# Altium PCB ECG_NEMO_final_V1B_main_stack1_fix.PcbDoc
Units mm, origin at the board's own origin, x right, y up, seen from the top; angles counter-clockwise.
Board outline 53.37 x 46.3 mm, 4 copper layers (Top Layer, Signal Layer 1, Signal Layer 2, Bottom Layer), stack 0.778 mm thick; 52 components, 36 nets, 182 pads, 117 vias.
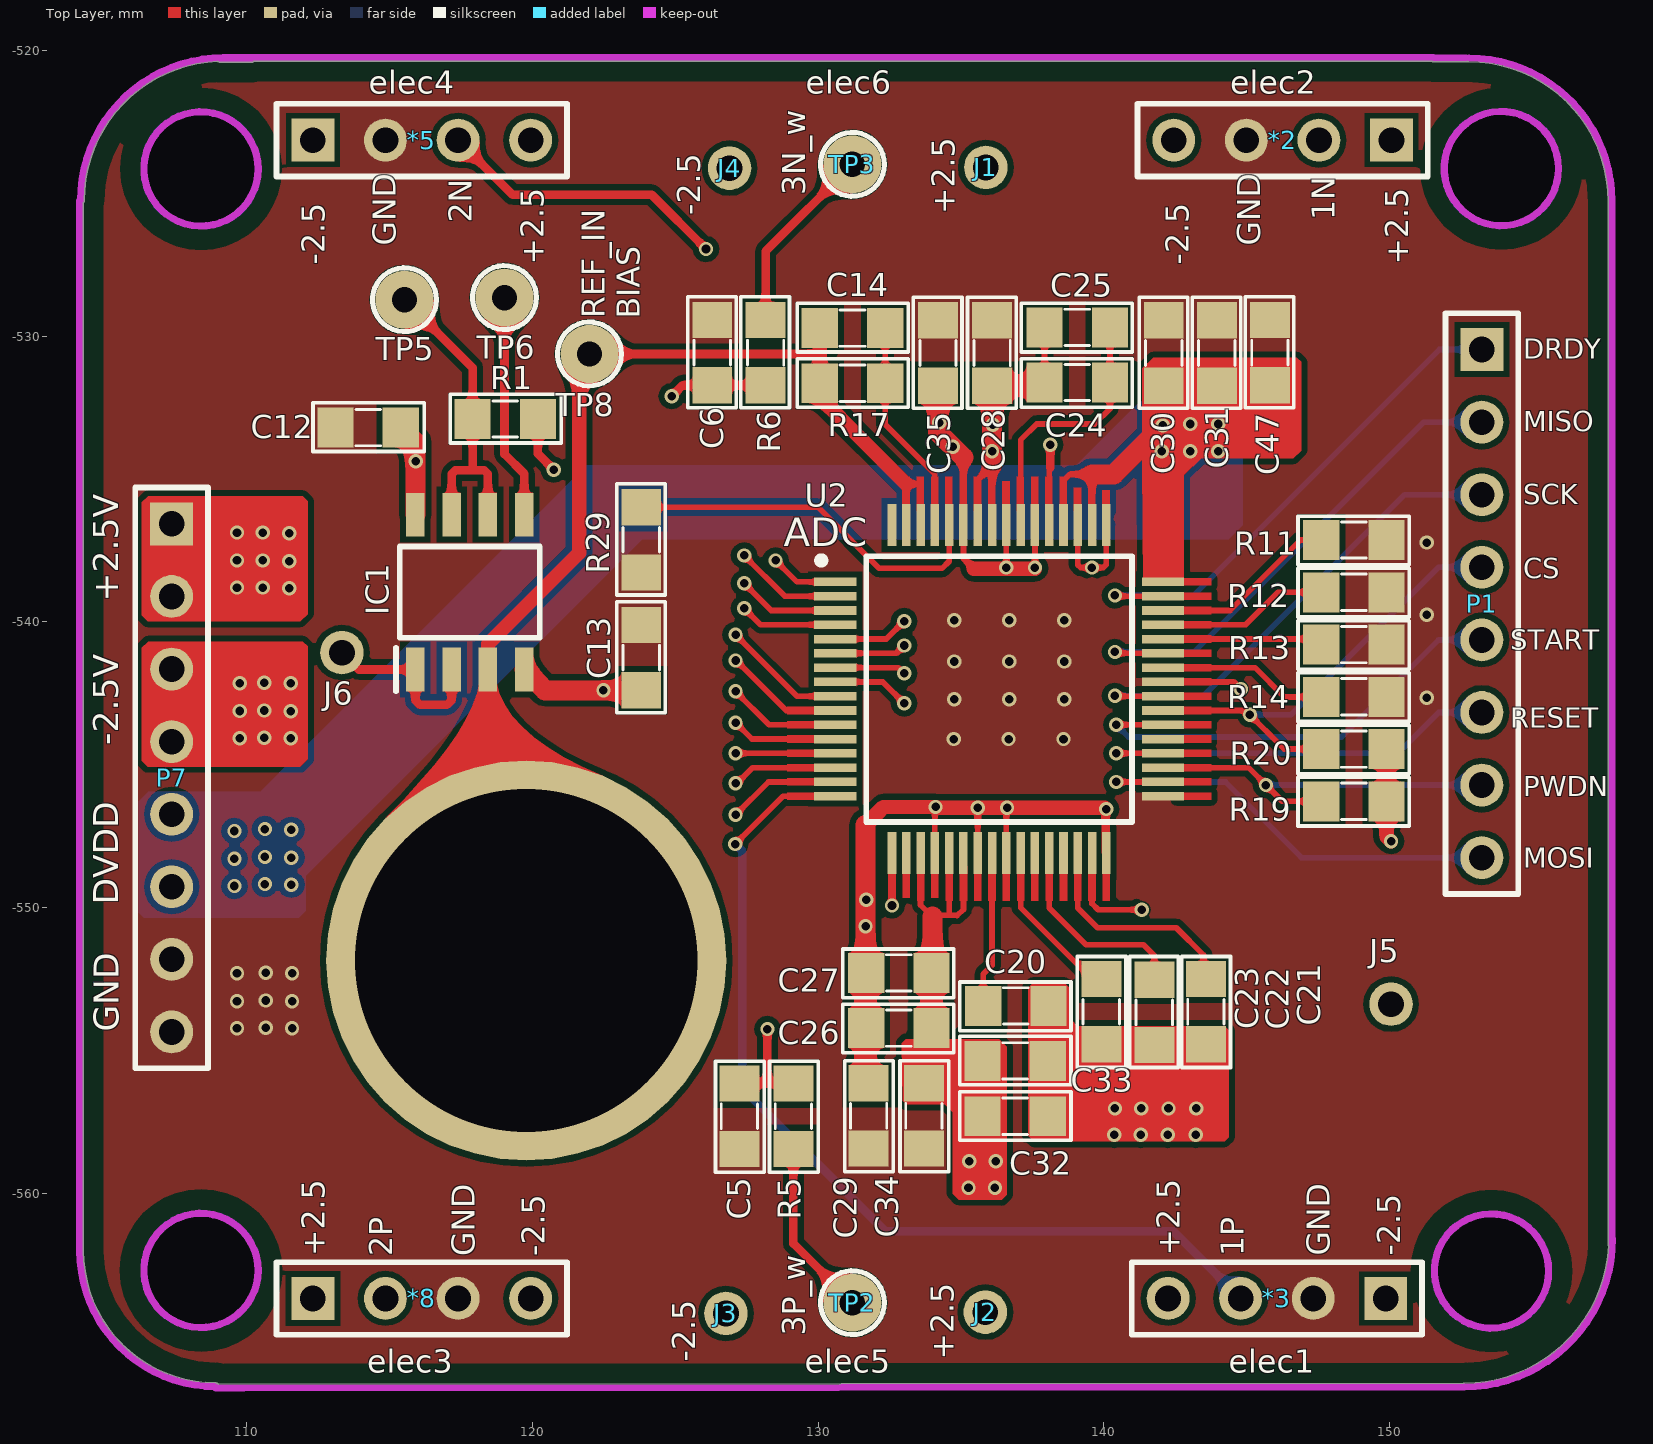
[diagram p0: Top Layer view]
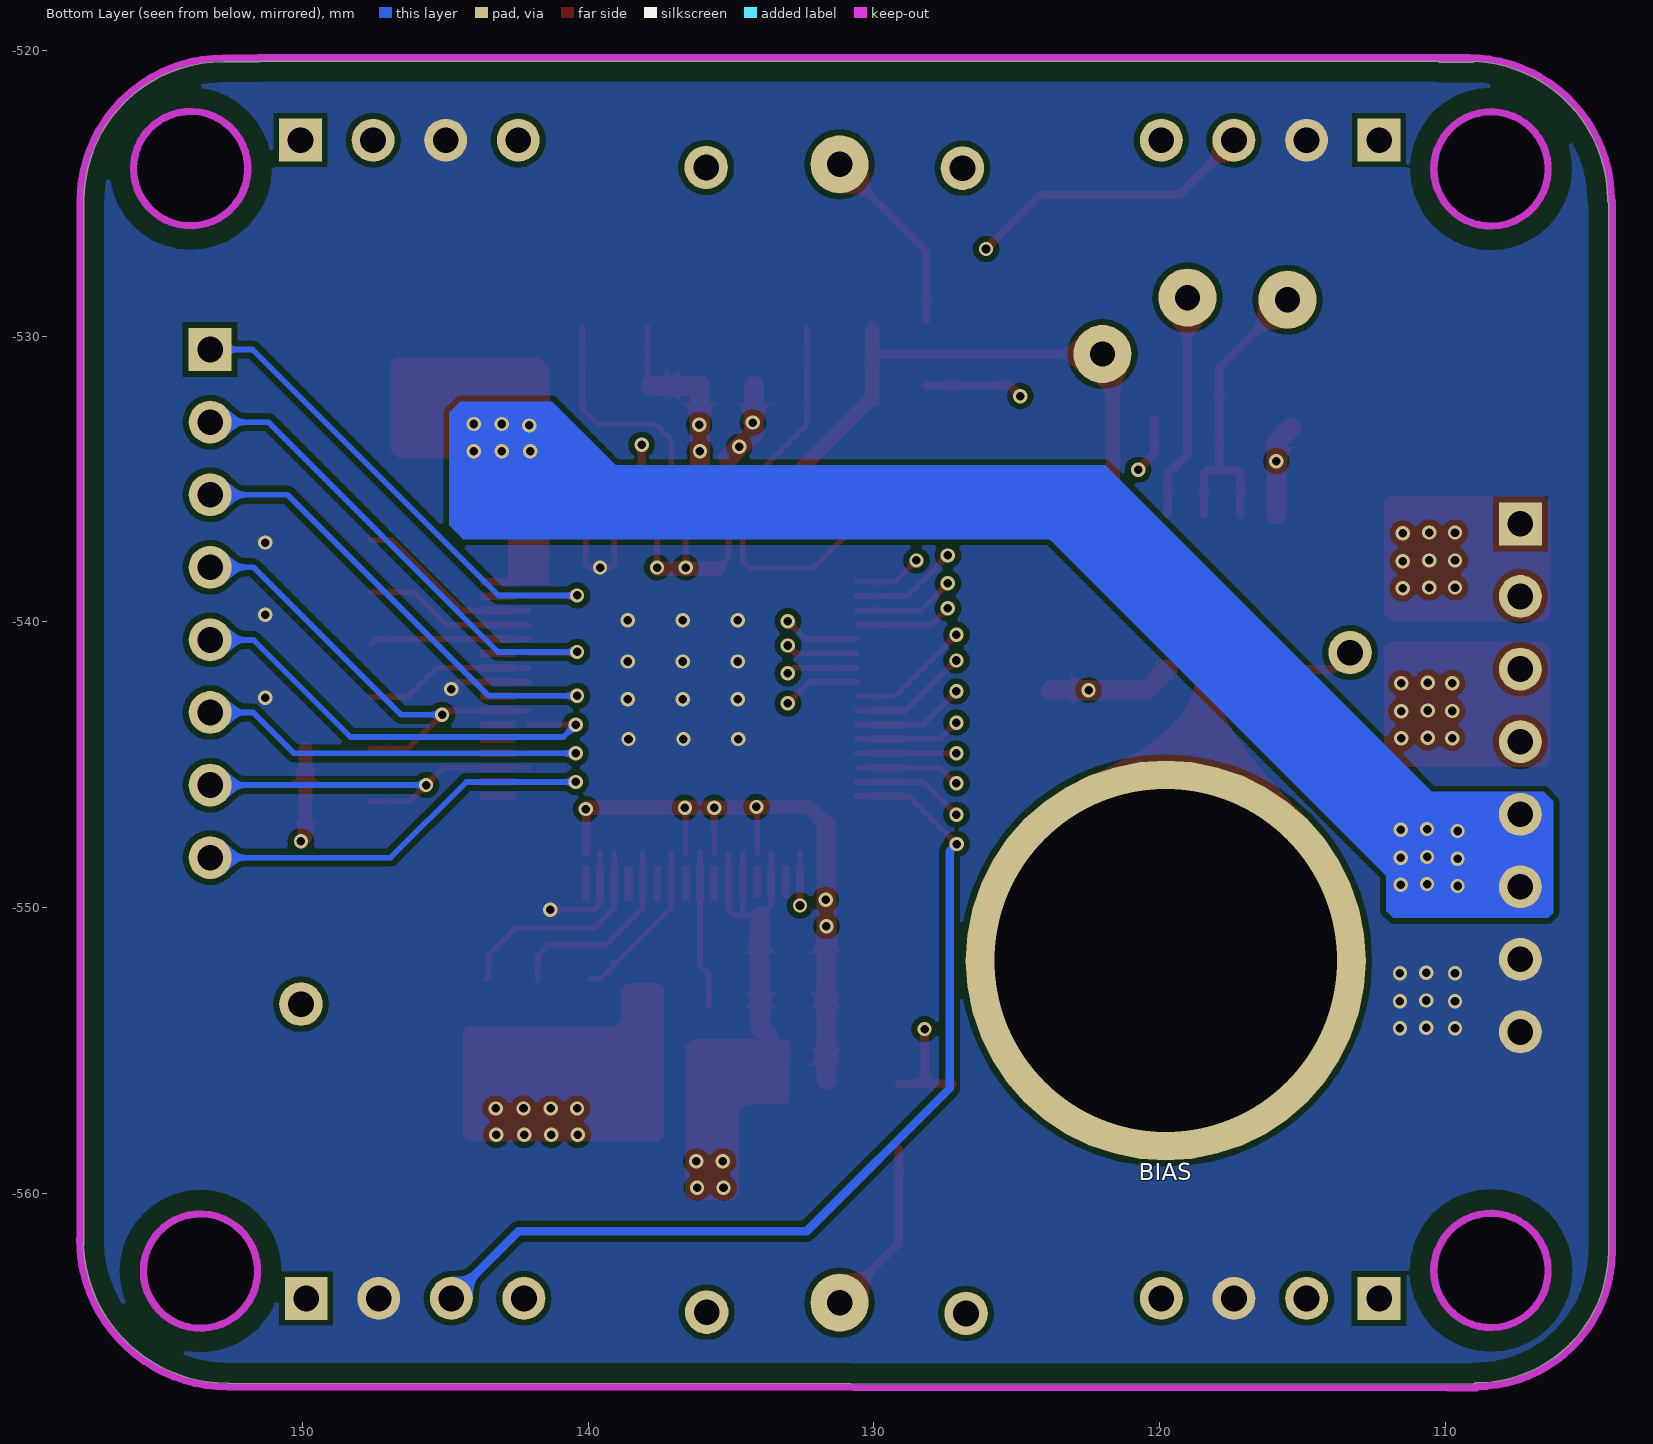
[diagram p1: Bottom Layer view, seen from below]
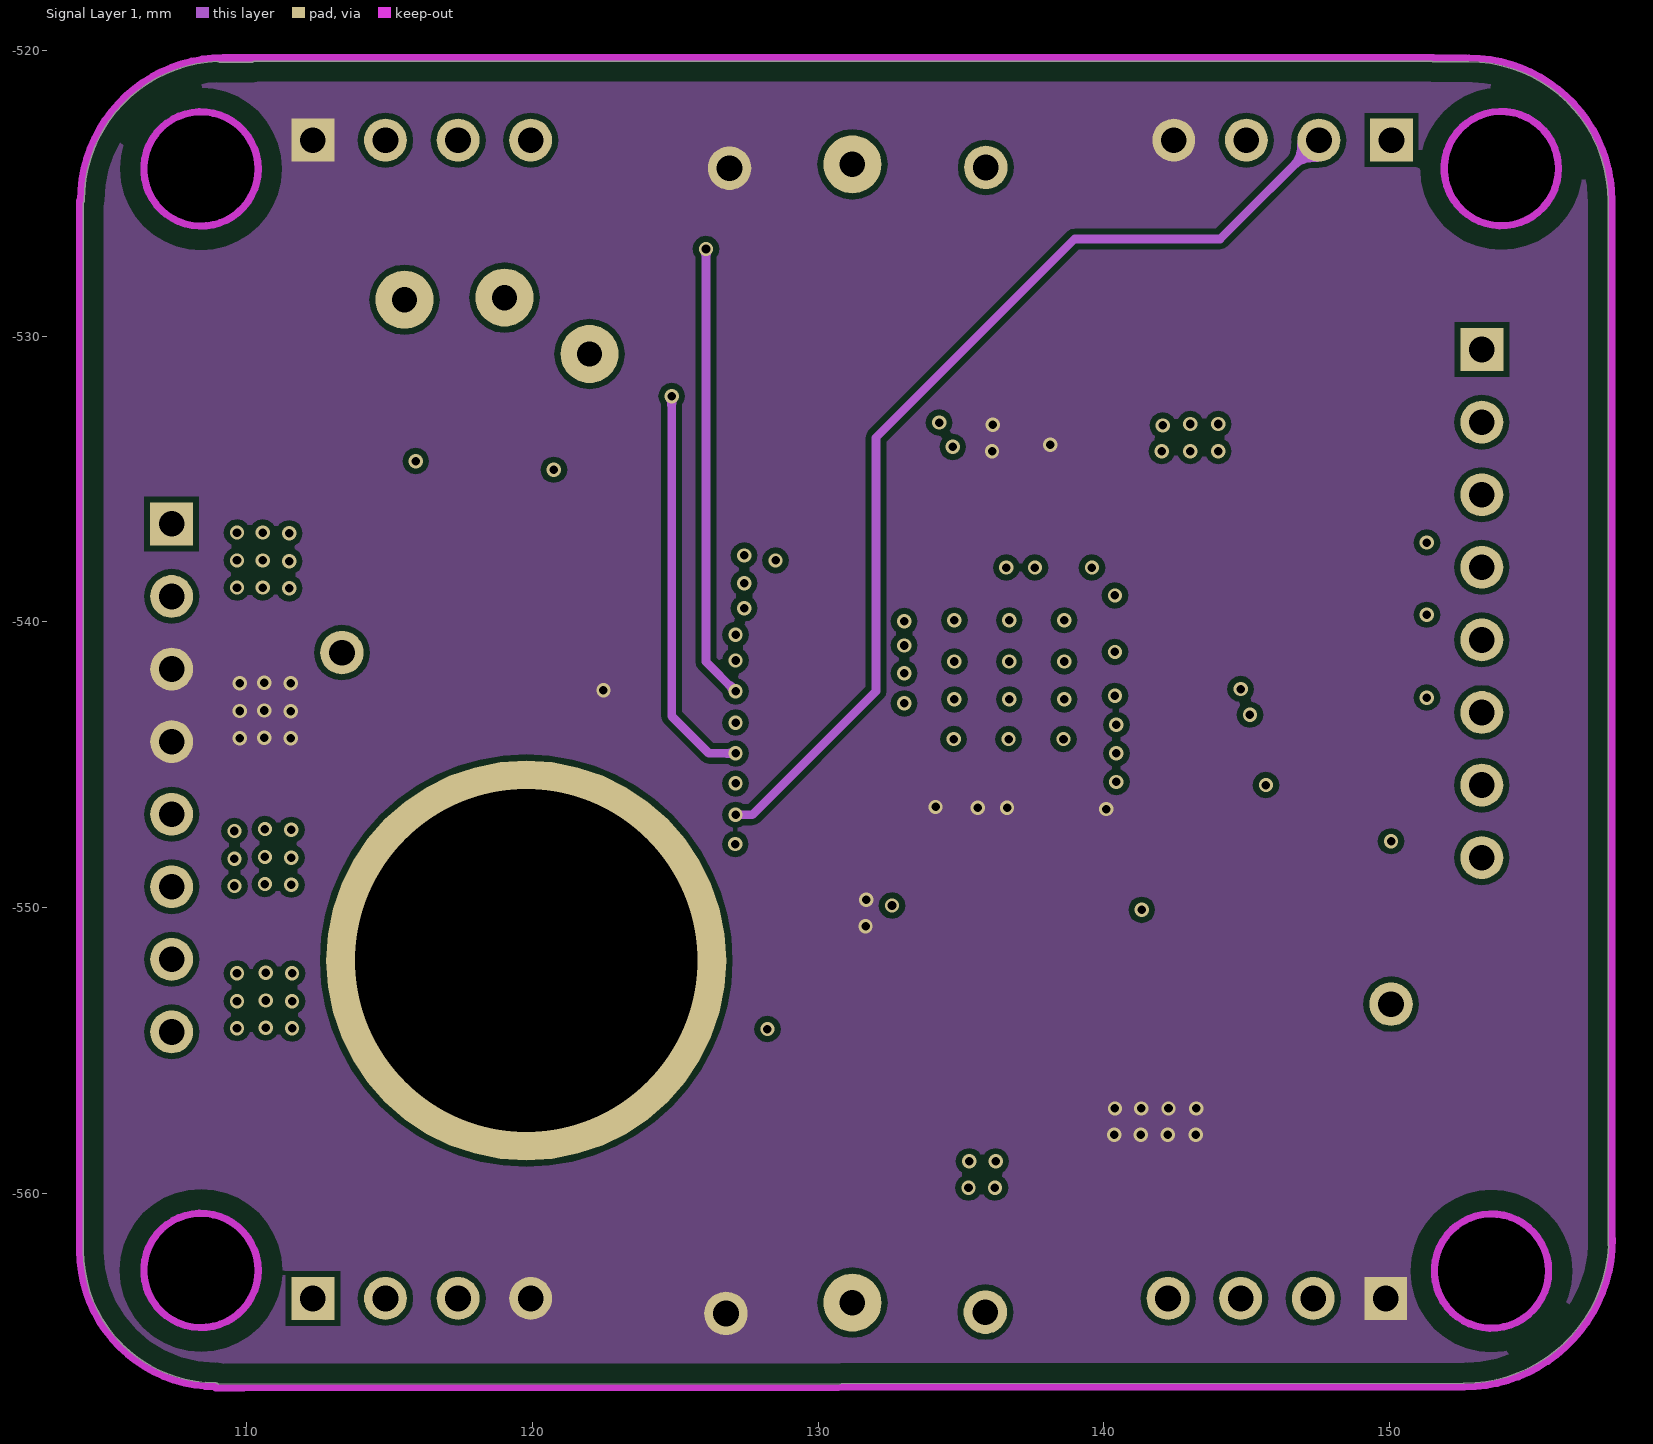
[diagram p2: Signal Layer 1]
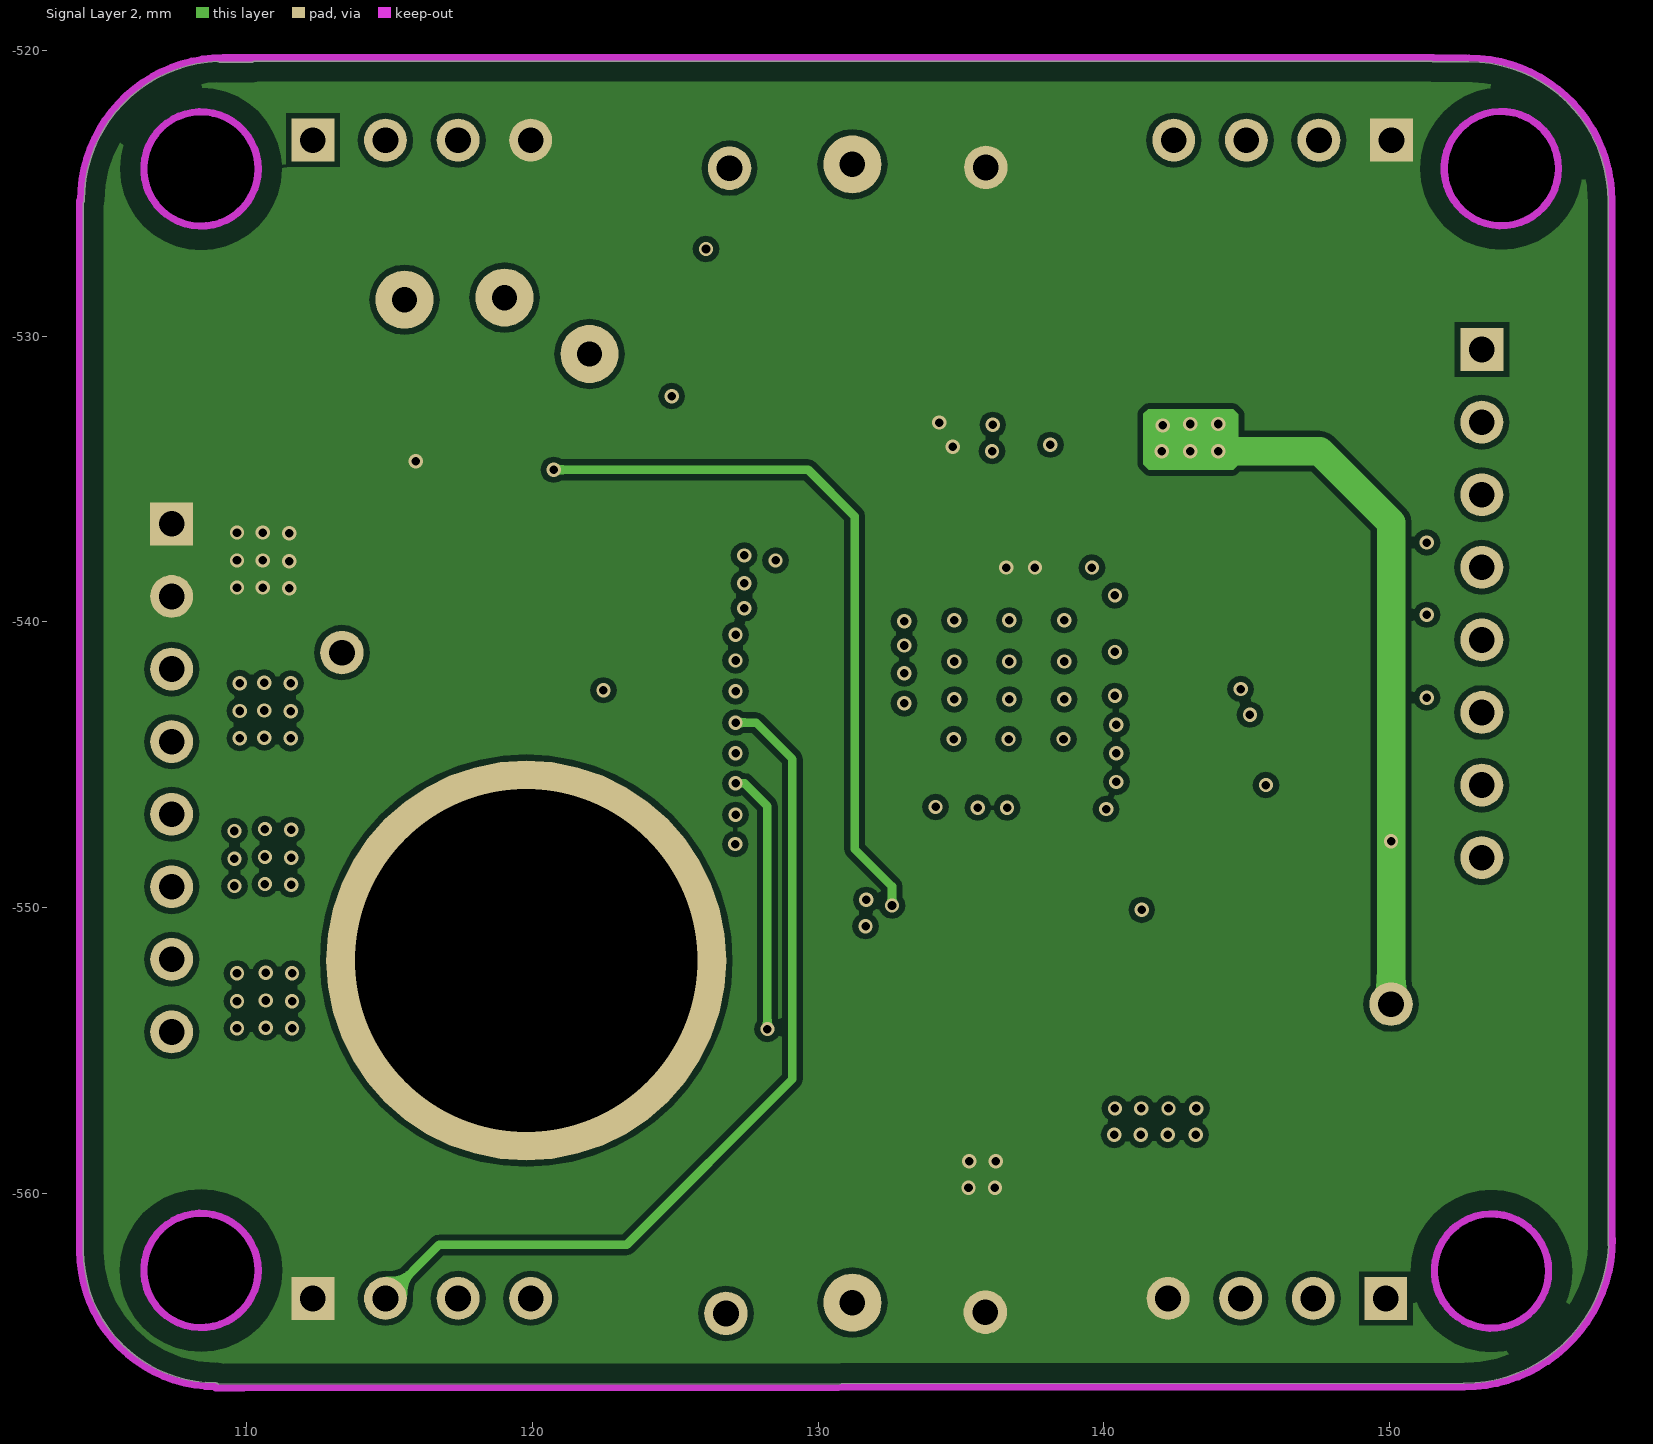
[diagram p3: Signal Layer 2]
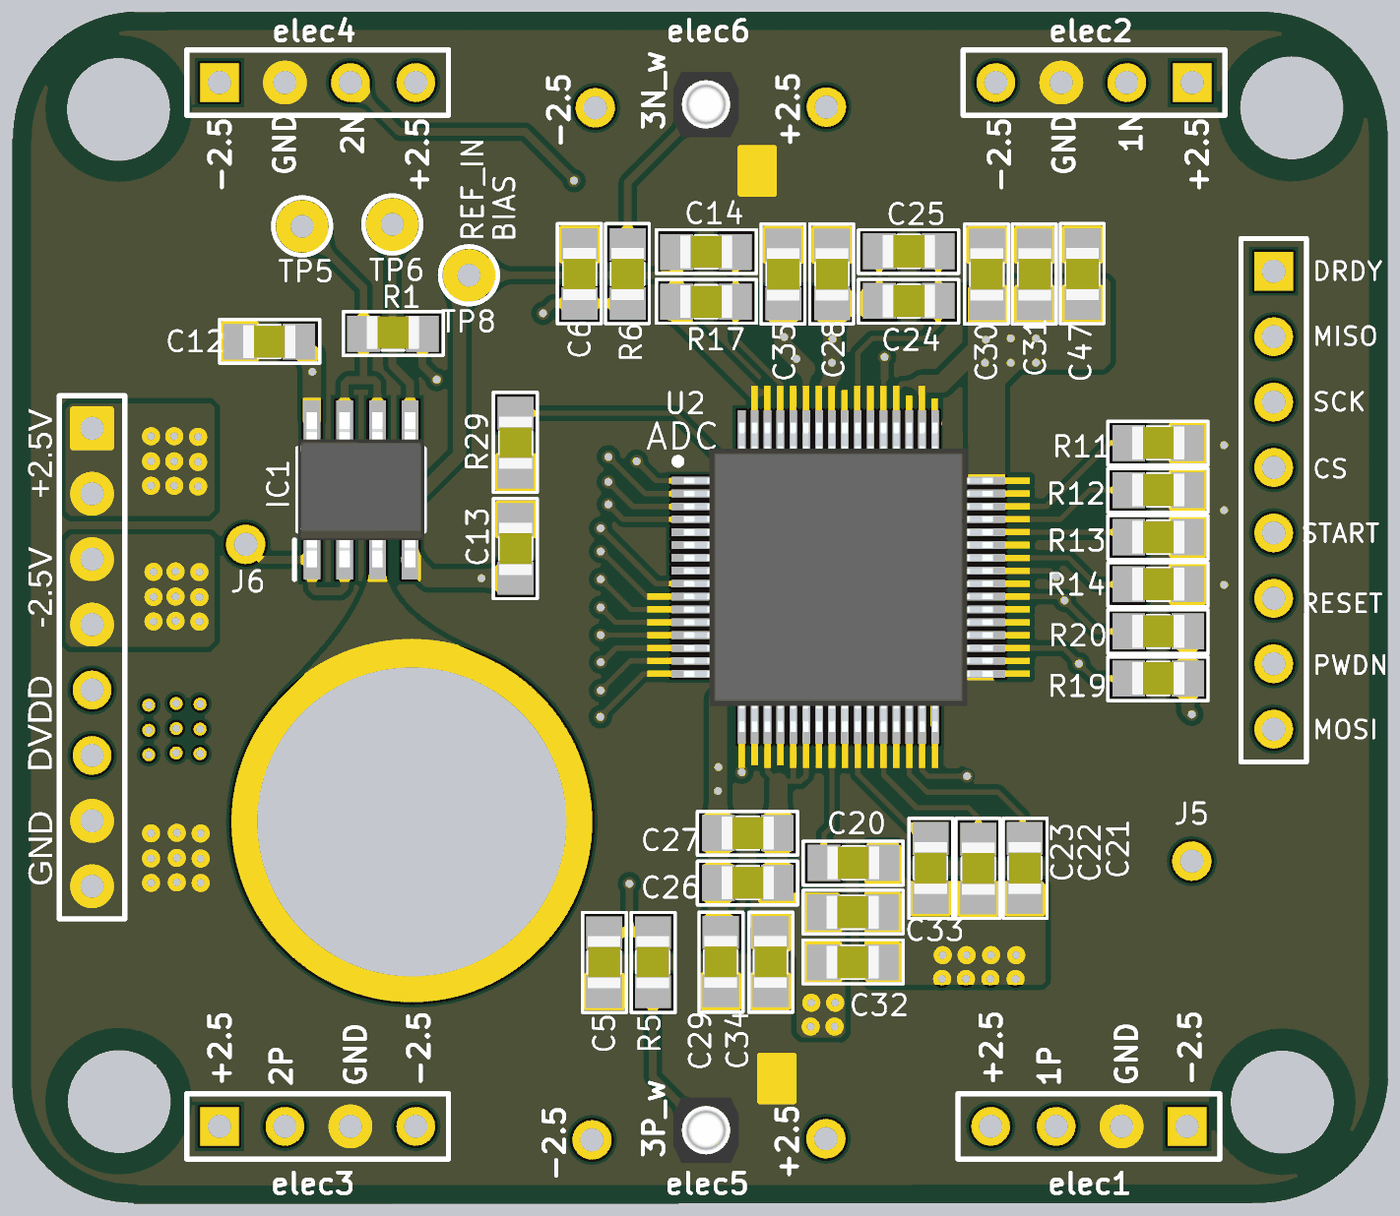
[diagram p4: 3D render of the assembled board from above, using the file's embedded part models]

## Layer stack, top to bottom
Top Solder: solder mask 0.0102, Solder Resist, Dk 3.5
Top Layer: signal copper 0.0356
Dielectric 1: core 0.254, FR-4, Dk 4.2
Signal Layer 1: signal copper 0.036
Dielectric 3: prepreg 0.127, Dk 4.2
Signal Layer 2: signal copper 0.036
Dielectric 2: core 0.254, Dk 4.2
Bottom Layer: signal copper 0.0356
Solder Side: solder mask 0.0102, Solder Resist, Dk 3.5

## Board outline
104.287,-562.003 ccw(c108.916,-562.003) 108.916,-566.631 cw(c108.916,-566.759) 109.021,-566.686 152.571,-566.649 cw(c152.608,-566.77) 152.608,-566.643 ccw(c152.608,-561.583) 157.661,-561.837 cw(c157.775,-561.78) 157.648,-561.78 157.648,-525.297 cw(c157.772,-525.27) 157.645,-525.27 ccw(c152.772,-525.27) 152.772,-520.397 cw(c152.772,-520.27) 152.728,-520.389 cw(c152.684,-520.27) 152.684,-520.397 151.531,-520.397 cw(c151.531,-520.27) 151.478,-520.386 126.183,-520.386 cw(c126.183,-520.258) 126.181,-520.386 cw(c126.183,-520.258) 126.181,-520.386 cw(c126.181,-520.258) 126.181,-520.386 110.254,-520.386 cw(c110.178,-520.283) 110.178,-520.411 109.058,-520.411 cw(c109.058,-520.283) 108.988,-520.389 ccw(c109.185,-525.258) 104.313,-525.258 cw(c104.185,-525.258) 104.287,-525.334
cut-out: 106.403,-524.186 cw(c108.403,-524.186) 108.403,-522.186 cw(c108.403,-524.186) 110.403,-524.186 cw(c108.403,-524.186) 108.403,-526.186 cw(c108.403,-524.186)
cut-out: 106.428,-562.711 cw(c108.428,-562.711) 108.428,-560.711 cw(c108.428,-562.711) 110.428,-562.711 cw(c108.428,-562.711) 108.428,-564.711 cw(c108.428,-562.711)
cut-out: 151.562,-562.732 cw(c153.562,-562.732) 153.562,-560.732 cw(c153.562,-562.732) 155.562,-562.732 cw(c153.562,-562.732) 153.562,-564.732 cw(c153.562,-562.732)
cut-out: 151.928,-524.122 cw(c153.928,-524.122) 153.928,-522.122 cw(c153.928,-524.122) 155.928,-524.122 cw(c153.928,-524.122) 153.928,-526.122 cw(c153.928,-524.122)

## Design rules (kind name [scope] priority, off if disabled: settings)
Clearance Clearance_5mils [TouchesRoom('Driver') and OnTopLayer] p1: gap=0.127 ignorepadtopadclearanceinfootprint=TRUE
Clearance Clearance_5.7mils [TouchesRoom('FETs')] p2: gap=0.145 ignorepadtopadclearanceinfootprint=FALSE
Clearance Clearance_keepout [OnLayer('Keep-Out Layer')] p3: gap=0.711 ignorepadtopadclearanceinfootprint=FALSE
Clearance [All] p4: gap=0.203 ignorepadtopadclearanceinfootprint=FALSE
ComponentClearance [All] p1: gap=0.3 collisioncheckmode=3 verticalgap=0.3 showdistances=TRUE
HoleSize [All] p1: absolutevalues=TRUE maxlimit=10 minlimit=0.025 maxpercent=80.000 minpercent=20.000
HoleToHoleClearance [All] p1: gap=0.241 allowstackedmicrovias=TRUE
MinimumSolderMaskSliver [All] p1 off: minsoldermaskwidth=0.254
PlaneConnect [All] p1: planeconnectstyle=Direct reliefexpansion=0.508 reliefentries=4 reliefconductorwidth=0.254 reliefairgap=0.254
PolygonConnect [All] p1: connectstyle=Direct reliefconductorwidth=0.254 reliefentries=4 polygonreliefangle="90 Angle" airgapwidth=0.254
RoutingVias [All] p1: holewidth=0.3 width=0.5 viastyle="Through Hole" minholewidth=0.178 minwidth=0.351 maxholewidth=0.508 maxwidth=0.762
SilkToSilkClearance [All] p1 off: silktosilkclearance=0.254
SilkToSolderMaskClearance [IsPad] p1 off: minsilkscreentomaskgap=0.254 clearancetoexposedcopper=TRUE
SolderMaskExpansion [All] p1: expansion=0.102 istentingtop=FALSE
UnRoutedNet [All] p1: checkbadconnections=TRUE
UnpouredPolygon [All] p1 off:
Width [All] p1: maxlimit=3 minlimit=0.2 preferedwidth=0.3
21 further rules are at their usual default settings.

## Components (designator, comment, footprint, x,y, rotation, side; value= is the part's Value field where it differs from the comment)
*2 "HEADER 4X1" HEADER4X1 150.065,-523.142 r180 top
*3 "HEADER 4X1" HEADER4X1 149.865,-563.675 r180 top
*5 "HEADER 4X1" HEADER4X1 112.318,-523.142 r0 top
*8 "HEADER 4X1" HEADER4X1 112.318,-563.675 r0 top
C5 "4.7nF" SM-0805 127.245,-557.3 r90 top value=103
C6 "4.7nF" SM-0805 126.295,-530.575 r270 top value=103
C12 "0.1uF" SM-0805 114.254,-533.2 r180 top value=103
C13 "0.1uF" SM-0805 123.81,-541.25 r270 top value=103
C14 "1nF" SM-0805 131.202,-529.719 r180 top value=103
C20 "10uF" SM-0805 136.917,-553.439 r0 top value=103
C21 "1uF" SM-0805 143.567,-553.64 r90 top value=103
C22 "100uF" SM-0805 141.764,-553.665 r270 top value=103
C23 "1uF" SM-0805 139.91,-553.64 r90 top value=103
C24 "1uF" SM-0805 139.067,-531.624 r0 top value=103
C25 "0.1uF" SM-0805 139.067,-529.694 r0 top value=103
C26 "1uF" SM-0805 132.821,-554.214 r0 top value=103
C27 "0.1uF" SM-0805 132.821,-552.284 r0 top value=103
C28 "1uF" SM-0805 136.088,-530.59 r270 top value=103
C29 "0.1uF" SM-0805 131.767,-557.287 r90 top value=103
C30 "1uF" SM-0805 142.094,-530.59 r270 top value=103
C31 "0.1uF" SM-0805 143.951,-530.59 r270 top value=103
C32 "1uF" SM-0805 136.892,-557.3 r180 top value=103
C33 "0.1uF" SM-0805 136.892,-555.363 r180 top value=103
C34 "1uF" SM-0805 133.701,-557.287 r90 top value=103
C35 "0.1uF" SM-0805 134.195,-530.59 r270 top value=103
C47 "10uF" SM-0805 145.81,-530.575 r270 top value=103
IC1 "OPA2376AIDRG4" SOIC127P600X175-8N 117.81,-538.956 r90 top
J1 "Jump 1" PCBComponent_1 135.868,-524.095 r0 top
J2 "Jump 1" PCBComponent_1 135.85,-564.156 r0 top
J3 "Jump 1" PCBComponent_1 126.773,-564.2 r0 top
J4 "Jump 1" PCBComponent_1 126.9,-524.122 r0 top
J5 "Jump 1" PCBComponent_1 150.05,-553.376 r0 top
J6 "Jump 1" PCBComponent_1 113.334,-541.075 r0 top
P1 "BOT Header 1" HDR1X8 153.225,-530.47 r270 top
P7 "TOP Header 3" HDR1X8 107.375,-536.57 r270 top
R1 "0" SM-0805 119.05,-532.9 r180 top value="R1/4W - 1K"
R5 "4.99k" SM-0805 129.135,-557.3 r90 top value="R1/4W - 1K"
R6 "4.99k" SM-0805 128.16,-530.575 r270 top value="R1/4W - 1K"
R11 "10k" SM-0805 148.748,-537.136 r0 top value="R1/4W - 1K"
R12 "10k" SM-0805 148.748,-538.964 r0 top value="R1/4W - 1K"
R13 "10k" SM-0805 148.748,-540.793 r0 top value="R1/4W - 1K"
R14 "10k" SM-0805 148.748,-542.622 r0 top value="R1/4W - 1K"
R17 "499k, 01%" SM-0805 131.202,-531.649 r180 top value="R1/4W - 1K"
R19 "10k" SM-0805 148.748,-546.28 r0 top value="R1/4W - 1K"
R20 "10k" SM-0805 148.748,-544.451 r0 top value="R1/4W - 1K"
R29 "1k" SM-0805 123.81,-537.127 r270 top value="R1/4W - 1K"
TP2 "TP" TP1 131.2,-563.822 r0 top value="Test Point"
TP3 "TP" TP1 131.2,-523.989 r0 top value="Test Point"
TP5 "TP" TP1 115.525,-528.725 r180 top value="Test Point"
TP6 "TP" TP1 119.025,-528.65 r180 top value="Test Point"
TP8 "TP" TP1 122,-530.625 r180 top value="Test Point"
U2 "Part Number: ADS1299IPAGR" QFP50P1200X1200X120-64N 136.335,-542.35 r0 top value=Value

## Footprints (in the part's own frame and the unit in brackets; to place one, negate y for a bottom-side part, rotate by r counter-clockwise, add the part's x,y. Pads: shape width x height; smd on the part's side, far side on the other; paste and mask are expansions set on the pad)
HDR1X8 [mm] "Connector; Header; 8 Position"
  rect 1.5x1.5 hole 0.9: 1(0,0)
  round 1.5 hole 0.9: 2(2.54,0) 3(5.08,0) 4(7.62,0) 5(10.16,0) 6(12.7,0) 7(15.24,0) 8(17.78,0)
  silkscreen extent -1.27,-1.27 19.05,1.27
HEADER4X1 [mm]
  rect 1.5x1.5 hole 0.9: 1(0,0)
  round 1.5 hole 0.9: 2(2.54,0) 3(5.08,0) 4(7.62,0)
  silkscreen extent -1.27,-1.27 8.89,1.27, body extent -1.27,-1.27 8.9,1.31, height 1.5
PCBComponent_1 [mil]
  round 60 hole 35.43: 1(0,0)
QFP50P1200X1200X120-64N [mm]
  rect 1.475x0.3 smd: 1(-5.738,3.75) 2(-5.738,3.25) 3(-5.738,2.75) 4(-5.738,2.25) 5(-5.738,1.75) 6(-5.738,1.25) 7(-5.738,0.75) 8(-5.738,0.25) 9(-5.738,-0.25) 10(-5.738,-0.75) 11(-5.738,-1.25) 12(-5.738,-1.75) 13(-5.738,-2.25) 14(-5.738,-2.75) 15(-5.738,-3.25) 16(-5.738,-3.75) 33(5.738,-3.75) 34(5.738,-3.25) 35(5.738,-2.75) 36(5.738,-2.25) 37(5.738,-1.75) 38(5.738,-1.25) 39(5.738,-0.75) 40(5.738,-0.25) 41(5.738,0.25) 42(5.738,0.75) 43(5.738,1.25) 44(5.738,1.75) 45(5.738,2.25) 46(5.738,2.75) 47(5.738,3.25) 48(5.738,3.75)
  rect 0.3x1.475 smd: 17(-3.75,-5.738) 18(-3.25,-5.738) 19(-2.75,-5.738) 20(-2.25,-5.738) 21(-1.75,-5.738) 22(-1.25,-5.738) 23(-0.75,-5.738) 24(-0.25,-5.738) 25(0.25,-5.738) 26(0.75,-5.738) 27(1.25,-5.738) 28(1.75,-5.738) 29(2.25,-5.738) 30(2.75,-5.738) 31(3.25,-5.738) 32(3.75,-5.738) 49(3.75,5.738) 50(3.25,5.738) 51(2.75,5.738) 52(2.25,5.738) 53(1.75,5.738) 54(1.25,5.738) 55(0.75,5.738) 56(0.25,5.738) 57(-0.25,5.738) 58(-0.75,5.738) 59(-1.25,5.738) 60(-1.75,5.738) 61(-2.25,5.738) 62(-2.75,5.738) 63(-3.25,5.738) 64(-3.75,5.738)
  silkscreen extent -6.35,-4.65 4.65,4.65, body extent -6,-6 6,6, height 1.2
SM-0805 [mil]
  rect 50x55 smd: 1(-45,0) 2(45,0)
  silkscreen extent -77,-34 76,33, body extent -40,-25 40,25, height 24
SOIC127P600X175-8N [mm]
  rect 1.528x0.65 smd: 1(-2.711,1.905) 2(-2.711,0.635) 3(-2.711,-0.635) 4(-2.711,-1.905) 5(2.711,-1.905) 6(2.711,-0.635) 7(2.711,0.635) 8(2.711,1.905)
  silkscreen extent -3.47,-2.45 1.6,2.58, body extent -3.01,-2.45 3.01,2.45, height 1.63
TP1 [mil] "Test point"
  round 80 hole 35: 1(0,0)
  silkscreen extent -44,-44 44,44, body extent -50,-50 50,50, height 178

## Part data
C5 C6 C12 C13 C14 C20 C21 C22 C23 C24 C25 C26 C27 C28 C29 C30 C31 C32 C33 C34 C35 C47: library part CM, "Cap SMD"
IC1: "Integrated Circuit", Manufacturer_Name="Texas Instruments", Mouser Part Number=595-OPA2376AIDRG4, Arrow Part Number=OPA2376AIDRG4, Arrow Price/Stock=https://www.arrow.com/en/products/opa2376aidrg4/texas-instruments, Datasheet Link=https://datasheet.datasheetarchive.com/originals/distributors/SFDatasheet-6/sf-000133686.pdf, Height=1.75mm, Manufacturer_Part_Number=OPA2376AIDRG4, Mouser Price/Stock=https://www.mouser.co.uk/ProductDetail/Texas-Instruments/OPA2376AIDRG4?qs=IUbkBnfnSQIcJ9njy8NzUg%3D%3D
J1 J2 J3 J4 J5 J6: library part jump1
P1 P7: library part "Header 8", "Header, 8-Pin", LatestRevisionDate=17-Jul-2002, LatestRevisionNote="Re-released for DXP Platform.", Publisher="Altium Limited"
R1 R5 R6 R11 R12 R13 R14 R17 R19 R20 R29: library part R, "Resistor 1/4W"
TP2 TP3 TP5 TP6 TP8: library part TP1, "Test Point"
U2: library part ADS1299IPAGR, "No Description Available", Built_By=EMA_UL_Team, Copyright="Copyright (C) 2018 Accelerated Designs. All rights reserved", Manufacturer_Part_Number=ADS1299IPAGR, RefDes=RefDes, Type=DEV, Vendor="Texas Instruments"

## Free pads (board coordinates)
  round 14 hole 12: 1(119.785,-551.85)

## Via types
v1: diameter 0.5, hole 0.3, Top Layer to Bottom Layer, tented both sides, 69 vias
v2: diameter 0.5, hole 0.3, Top Layer to Bottom Layer, 48 vias

## Nets (pads, with @x,y where several pads share a name; then routed paths per layer and width w, separated by ;. In a path a pad name is that pad's centre, name@x,y a point inside that pad or via, vN(x,y) a via of type N, cw(c..) or ccw(c..) an arc to the next point about the centre after c; other vN are vias at no path point)
+2.5V: *2.1 *3.4 *5.4 *8.1 C12.1 C26.2 C27.2 C32.2 C33.2 C34.2 C35.2 IC1.8 J1.1 J2.1 P7.1 P7.2 U2.19 U2.21 U2.22 U2.54 U2.56 U2.59 | length 33.1
  Top Layer w0.2: U2.19 133.585,-549.904 133.95,-550.269 134.585,-550.269 ; U2.21 134.585,-550.267 ; U2.22 135.085,-550.064 134.862,-550.275 134.585,-550.267 ; 135.085,-534.25 U2.59 135.085,-537.774 135.448,-538.137 ; v1(136.585,-538.1) U2.56 ; v1@137.585,-538.137 v1(137.585,-538.1) U2.54 ; 134.585,-550.269 134.585,-550.267 ; 134.585,-550.269 134.513,-550.265 134.585,-550.267
  Top Layer w0.5: 135.448,-538.137 v1@137.585,-538.137
  Top Layer w0.7: C12.1 115.905,-533.708 IC1.8 ; 134.01,-550.302 134.01,-552.238 C27.2 C26.2 133.701,-554.478 C34.2 135.73,-556.144 135.749,-556.164 ; C35.2 134.195,-533.36 135.085,-534.25 ; C32.2 135.749,-556.164 ; C33.2 135.749,-556.164
  other v1: 115.918,-534.375 134.71,-533.875 134.235,-533.025
  other v2: 135.26,-559.8 136.185,-559.8 135.285,-558.875 136.21,-558.875 111.489,-538.825 109.663,-538.8 110.564,-538.8 111.489,-537.875 109.663,-537.85 110.564,-537.85 111.489,-536.9 109.663,-536.875 110.564,-536.875
-2.5V: *2.4 *3.1 *5.1 *8.4 C13.2 C20.2 C21.1 C22.2 C23.1 C24.1 C25.1 C26.1 C27.1 C28.2 C29.2 C32.1 C33.1 IC1.4 J3.1 J4.1 P7.3 P7.4 U2.20 U2.23 U2.25 U2.32 U2.53 U2.57 U2.58 | length 51.6
  Top Layer w0.2: U2.20 134.085,-546.5 v1(134.11,-546.475) ; U2.23 v1(135.585,-546.5) ; U2.58 135.585,-535.025 136.088,-534.522 136.088,-536.609 U2.57 ; U2.25 136.585,-546.525 v1(136.61,-546.5) ; C24.1@137.816,-531.733 C24.1 C25.1 ; U2.53 138.085,-534.7 ; U2.32@140.06,-548.063 U2.32
  Top Layer w0.3: C29.2@131.66,-556.037 C29.2 ; v1(134.11,-546.475) v1@134.135,-546.5 ; 138.125,-534.611 v1(138.125,-533.8) ; v1@140.027,-546.5 v1(140.077,-546.55) 140.06,-546.567 U2.32@140.06,-548.063
  Top Layer w0.5: 131.66,-547.1 132.285,-546.475 v1(134.11,-546.475) ; v1@134.135,-546.5 v1(135.585,-546.5) v1(136.61,-546.5) v1@140.027,-546.5
  Top Layer w0.7: IC1.4 120.441,-542.393 C13.2 ; C29.2@131.66,-556.037 131.66,-547.1 ; 136.088,-534.522 C28.2 C24.1@137.816,-531.733 ; C32.1 C33.1 ; C33.1@138.06,-555.338 C33.1@138.06,-554.783 ; C20.2 C33.1@138.06,-554.783 ; C21.1 C23.1 C33.1@138.06,-554.783
  other v1: 131.659,-550.65 131.684,-549.725 122.485,-542.393 136.085,-534.025 136.11,-533.1
  other v2: 140.36,-557.95 141.285,-557.95 142.235,-557.95 143.21,-557.95 140.385,-557.025 141.31,-557.025 142.26,-557.025 143.235,-557.025 109.758,-544.068 111.539,-544.075 110.614,-544.05 109.758,-543.118 111.539,-543.125 110.614,-543.1 109.758,-542.143 110.614,-542.125 111.539,-542.15
BIAS: C14.2 IC1.3 pad.1 R17.2 TP8.1 U2.62 U2.63 | length 41.4
  Top Layer w0.2: U2.63 133.085,-535.175 133.56,-535.175 133.585,-535.2 U2.62
  Top Layer w0.3: TP8.1 130.059,-530.625
  Top Layer w0.5: pad.1 118.445,-550.51 IC1.3 118.445,-540.775 121.635,-537.585 121.635,-530.99 TP8.1 ; C14.2 130.059,-530.625 R17.2 130.059,-532.149 133.085,-535.175
CS: P1.4 R20.1 U2.39 | length 16.3
  Top Layer w0.2: U2.39 144.96,-543.1 146.311,-544.451 R20.1
  Bottom Layer w0.2: v1(145.11,-543.25) 146.55,-543.25 151.71,-538.09 P1.4
DRDY: P1.1 U2.47 | length 18.1
  Top Layer w0.2: v1(140.385,-539.075) 140.41,-539.1 U2.47
  Bottom Layer w0.2: v1(140.385,-539.075) 143.134,-539.075 151.739,-530.47 P1.1
DVDD: C30.2 C31.2 C47.2 J5.1 P7.5 P7.6 R19.2 R20.2 U2.48 U2.50 U2.52 | length 80.7
  Top Layer w0.2: U2.52 138.585,-535.059 138.81,-534.834 139.585,-534.834 U2.50 ; C30.2@142.06,-531.767 C30.2 ; C47.2@145.795,-531.733 C47.2
  Top Layer w0.5: R20.2 R19.2 149.891,-547.516 v1(150.05,-547.675)
  Top Layer w0.7: 139.585,-534.834 140.351,-534.834 v1(142.06,-533.125) C30.2@142.06,-531.767 ; C30.2 C31.2 C47.2@145.795,-531.733
  Signal Layer 2 w1: v1(144,-534.025) 147.55,-534.025 150.05,-536.525 v1(150.05,-547.675) J5.1
  Bottom Layer w1: P7.5 113.445,-546.73 124.575,-535.6 140.25,-535.6 142.06,-533.79 v1(142.06,-533.125)
  other v1: 142.025,-534.025 143.025,-534.025 143.025,-533.075 144,-533.075
  other v2: 109.572,-549.243 111.564,-549.2 110.639,-549.175 109.572,-548.293 111.564,-548.25 110.639,-548.225 109.572,-547.318 111.564,-547.275 110.639,-547.25
Elec_1: *3.3 U2.16 | length 33.3
  Top Layer w0.2: v1(127.1,-547.775) 128.775,-546.1 U2.16
  Bottom Layer w0.3: v1(127.1,-547.775) 127.35,-548.025 127.35,-556.325 132.35,-561.325 142.435,-561.325 *3.3
Elec_2: *2.2 U2.15 | length 39.4
  Top Layer w0.2: v1(127.11,-546.75) 128.26,-545.6 U2.15
  Signal Layer 1 w0.3: v1(127.11,-546.75) 127.7,-546.75 132.025,-542.425 132.025,-533.55 138.975,-526.6 144.067,-526.6 *2.2
Elec_3: C5.2 R5.2 U2.14 | length 16.7
  Top Layer w0.2: v1@127.135,-545.675 127.71,-545.1 U2.14
  Top Layer w0.3: C5.2 128.225,-556.157 ; v1(128.225,-554.25) 128.225,-556.157 ; R5.2 128.225,-556.157
  Signal Layer 2 w0.3: v1(127.11,-545.65) 127.425,-545.65 128.225,-546.45 v1(128.225,-554.25)
Elec_4: C6.2 R6.2 U2.13 | length 20.9
  Top Layer w0.2: v1(127.11,-544.6) U2.13
  Top Layer w0.3: v1(124.875,-532.1) 125.257,-531.718 C6.2 R6.2
  Signal Layer 1 w0.3: v1(124.875,-532.1) 124.875,-543.3 126.175,-544.6 v1(127.11,-544.6)
Elec_5: *8.2 U2.12 | length 34.9
  Top Layer w0.2: v1(127.11,-543.525) 127.685,-544.1 U2.12
  Signal Layer 2 w0.3: *8.2 116.733,-561.8 123.3,-561.8 129.1,-556 129.1,-544.8 127.825,-543.525 v1(127.11,-543.525)
Elec_6: *5.3 U2.11 | length 30.1
  Top Layer w0.2: v1(127.11,-542.431) 128.279,-543.6 U2.11
  Top Layer w0.3: *5.3 119.306,-525.05 124.175,-525.05 v1(126.075,-526.95)
  Signal Layer 1 w0.3: v1(126.075,-526.95) 126.075,-541.396 v1(127.11,-542.431)
GND: *2.3 *3.2 *5.2 *8.3 C5.1 C6.1 C12.2 C13.1 C28.1 C29.1 C30.1 C31.1 C34.1 C35.1 C47.1 P7.7 P7.8 R11.2 R12.2 R13.2 R14.2 R29.2 U2.31 U2.33 U2.41 U2.49 U2.51 | length 10.3
  Top Layer w0.2: U2.51 139.085,-538 139.185,-538.1 v1(139.581,-538.1) 139.976,-538.1 140.077,-537.999 140.077,-536.62 U2.49 ; U2.31 139.585,-549.86 139.8,-550.075 v1(141.325,-550.075) ; U2.41 144.535,-542.1 v1(144.785,-542.35)
  other v1: 134.74,-544.1 136.663,-544.1 138.585,-544.1 134.765,-542.71 136.688,-542.71 138.61,-542.71 151.3,-542.65 134.765,-541.387 136.688,-541.387 138.61,-541.387 134.765,-539.941 136.688,-539.941 138.61,-539.941 151.3,-539.75 151.3,-537.225
  other v2: 109.663,-554.221 111.589,-554.225 110.664,-554.2 109.663,-553.271 111.589,-553.275 110.664,-553.25 109.663,-552.296 111.589,-552.3 110.664,-552.275
MISO: P1.2 U2.43 | length 17.9
  Top Layer w0.2: v1(140.385,-541.05) 140.435,-541.1 U2.43
  Bottom Layer w0.2: v1(140.385,-541.05) 143.15,-541.05 151.19,-533.01 P1.2
MOSI: P1.8 U2.34 | length 15.5
  Top Layer w0.2: v1(140.435,-545.6) U2.34
  Bottom Layer w0.2: v1(140.435,-545.6) 144.26,-545.6 146.91,-548.25 P1.8
NetC14_1: C14.1 R17.1 U2.61 | length 7.6
  Top Layer w0.2: C14.1 R17.1 132.345,-533.093 134.085,-534.833 U2.61
NetC20_1: C20.1 U2.24 | length 5.5
  Top Layer w0.2: C20.1 135.774,-552.325 136.085,-552.015 U2.24
NetC21_2: C21.2 U2.30 | length 7.9
  Top Layer w0.2: U2.30 139.085,-550.01 139.775,-550.7 142.529,-550.7 143.485,-551.656 143.485,-552.415 C21.2
NetC22_1: C22.1 U2.28 | length 7.1
  Top Layer w0.2: U2.28 138.085,-550.01 139.375,-551.3 141.385,-551.3 141.764,-551.679 C22.1
NetC23_2: C23.2 U2.26 | length 5.8
  Top Layer w0.2: U2.26 137.085,-550 139.582,-552.497 C23.2
NetC24_2: C24.2 C25.2 U2.55 | length 9.4
  Top Layer w0.2: U2.55 137.085,-533.64 137.65,-533.075 139.675,-533.075 140.21,-532.54 C24.2 ; C24.2 C25.2
NetIC1_1: IC1.1 IC1.2 J6.1 | length 6.4
  Top Layer w0.3: J6.1 113.926,-541.667 IC1.1 115.905,-542.745 116.06,-542.9 117.01,-542.9 117.175,-542.735 IC1.2
NetIC1_6: IC1.6 IC1.7 R1.2 TP5.1 | length 11.1
  Top Layer w0.3: TP5.1 117.907,-531.107 R1.2 117.907,-534.7 118.32,-534.7 118.445,-534.825 IC1.6 ; IC1.7 117.175,-534.825 117.3,-534.7 117.85,-534.7
NetR1_1: R1.1 U2.17 | length 29.2
  Top Layer w0.2: v1(132.585,-549.925) U2.17
  Top Layer w0.3: R1.1 120.193,-534.118 v1(120.75,-534.675)
  Signal Layer 2 w0.3: v1(120.75,-534.675) 129.65,-534.675 131.275,-536.3 131.275,-547.95 132.585,-549.26 v1(132.585,-549.925)
NetR11_1: R11.1 U2.46 | length 6.6
  Top Layer w0.2: U2.46 144.41,-539.6 146.874,-537.136 R11.1
NetR12_1: R12.1 U2.45 | length 6
  Top Layer w0.2: U2.45 144.96,-540.1 146.096,-538.964 R12.1
NetR13_1: R13.1 U2.44 | length 5.6
  Top Layer w0.2: U2.44 147.412,-540.6 R13.1
NetR14_1: R14.1 U2.42 | length 6
  Top Layer w0.2: U2.42 145.285,-541.6 146.31,-542.625 147.602,-542.625 R14.1
NetR29_1: R29.1 U2.60 | length 13
  Top Layer w0.2: R29.1 129.994,-535.984 132.136,-538.126 134.336,-538.126 134.585,-537.877 U2.60
PWDN: P1.7 R19.1 U2.35 | length 13.6
  Top Layer w0.2: U2.35 145.06,-545.1 146.24,-546.28 R19.1
  Bottom Layer w0.2: v1(145.67,-545.71) P1.7
REF_IN: IC1.5 TP6.1 | length 7.9
  Top Layer w0.3: TP6.1 119.025,-534.125 119.715,-534.815 IC1.5
RESET: P1.6 U2.36 | length 15
  Top Layer w0.2: v1(140.435,-544.6) U2.36
  Bottom Layer w0.2: v1(140.435,-544.6) 150.287,-544.6 151.717,-543.17 P1.6
SCK: P1.3 U2.40 | length 17.4
  Top Layer w0.2: v1(140.385,-542.587) 140.398,-542.6 U2.40
  Bottom Layer w0.2: v1(140.385,-542.587) 143.484,-542.587 150.521,-535.55 P1.3
Signal_3: R5.1 TP2.1 | length 6.2
  Top Layer w0.3: R5.1 129.135,-561.757 TP2.1
Signal_4: R6.1 TP3.1 | length 6.7
  Top Layer w0.3: R6.1 128.16,-527.029 TP3.1
START: P1.5 U2.38 | length 16
  Top Layer w0.2: v1(140.435,-543.6) U2.38
  Bottom Layer w0.2: v1(140.435,-543.6) 140.86,-544.025 148.311,-544.025 151.706,-540.63 P1.5
pads on no net: U2.1 U2.2 U2.3 U2.4 U2.5 U2.6 U2.7 U2.8 U2.9 U2.10 U2.18 U2.27 U2.29 U2.37 U2.64
copper on no net: | length 32.7
  Top Layer w0.2: v1@127.133,-540.45 v1(127.11,-540.45) 127.01,-540.35 129.26,-542.6 130.597,-542.6 ; v1@127.135,-541.35 128.885,-543.1 130.597,-543.1 ; v1(127.41,-539.525) 127.985,-540.1 130.597,-540.1 ; v1(127.41,-538.65) 128.36,-539.6 130.597,-539.6 ; v1(127.41,-537.675) 128.835,-539.1 130.597,-539.1 ; v1(128.51,-537.85) 129.26,-538.6 130.597,-538.6 ; 130.597,-542.1 132.26,-542.1 v1(133.01,-542.85) ; 130.597,-541.6 132.81,-541.6 v1(133.01,-541.8) ; 130.597,-541.1 132.735,-541.1 v1(133.01,-540.825) ; 130.597,-540.6 132.385,-540.6 v1(133.01,-539.975)
  Top Layer w0.254: 16.129,-451.104 16.383,-451.104
  other v1: 127.11,-541.35

## Polygon pours and split planes (outlines as drawn)
+2.5V on Signal Layer 2 "Signal Layer 2--2.5V" (solid, pour order 2): 104.272,-523.652 107.649,-520.275 154.075,-520.275 157.645,-523.845 157.645,-563.055 154.091,-566.609 107.559,-566.609 104.4,-563.45
GND on Bottom Layer "Bottom Layer-GND" (solid, pour order 4): 104.572,-523.177 107.372,-520.378 154.303,-520.378 157.645,-523.72 157.645,-562.855 154.366,-566.134 107.334,-566.134 104.702,-563.502
GND on Top Layer "Top Layer-GND" (solid, pour order 6): 104.122,-523.652 107.499,-520.275 154.075,-520.275 157.645,-523.845 157.645,-563.105 154.141,-566.609 107.409,-566.609 104.25,-563.45
-2.5V on Signal Layer 1 "Signal Layer 1-+2.5V" (solid, pour order 0): 104.272,-523.802 107.649,-520.425 153.9,-520.425 157.645,-524.17 157.645,-562.97 153.856,-566.759 107.559,-566.759 104.4,-563.6

## Keep-outs
Keep-Out Layer:
  circle w0.254: c153.562,-562.717 r2
  circle w0.254: c153.908,-524.136 r2
  circle w0.254: c108.403,-524.15 r2
  circle w0.254: c108.403,-562.696 r2
  lines w0.254: 104.16,-525.258 104.16,-562.003 ccw(c108.916,-562.003) 108.916,-566.759 ; 104.185,-525.258 cw(c109.185,-525.258) 109.185,-520.258 ; 109.058,-520.283 110.178,-520.283 ; 109.21,-520.258 126.181,-520.258 ; 109.898,-566.813 108.916,-566.813 152.574,-566.776 ; 126.183,-520.258 151.531,-520.258 ; 151.531,-520.27 152.684,-520.27 ; 152.608,-566.77 ccw(c152.608,-561.583) 157.795,-561.583 ; 152.772,-520.27 cw(c152.772,-525.27) 157.772,-525.27 ; 157.775,-561.78 157.775,-525.27

## Other copper
Top Layer:
  region net GND: 140.2,-535.4 140.2,-536.131 139.95,-536.131 139.95,-535.4
  region net DVDD: 139.7,-534.919 139.7,-536.131 139.45,-536.131 139.45,-534.919
  region net GND: 139.2,-535.3 139.2,-536.131 138.95,-536.131 138.95,-535.3
  region net DVDD: 138.7,-534.919 138.7,-536.131 138.45,-536.131 138.45,-534.919
  region net -2.5V: 138.2,-534.919 138.2,-536.131 137.95,-536.131 137.95,-534.919
  region net +2.5V: 137.7,-534.919 137.7,-536.131 137.45,-536.131 137.45,-534.919
  region net NetC24_2: 137.2,-534.919 137.2,-536.131 136.95,-536.131 136.95,-534.919
  region net +2.5V: 136.7,-535.075 136.7,-536.131 136.45,-536.131 136.45,-535.075
  region net -2.5V: 136.2,-534.919 136.2,-536.131 135.95,-536.131 135.95,-534.919
  region net -2.5V: 135.7,-534.919 135.7,-536.131 135.45,-536.131 135.45,-534.919
  region net +2.5V: 135.2,-534.919 135.2,-536.131 134.95,-536.131 134.95,-534.919
  region net NetR29_1: 134.7,-534.919 134.7,-536.131 134.45,-536.131 134.45,-534.919
  region net NetC14_1: 134.2,-534.919 134.2,-536.131 133.95,-536.131 133.95,-534.919
  region net BIAS: 133.7,-534.919 133.7,-536.131 133.45,-536.131 133.45,-534.919
  region net BIAS: 133.2,-534.919 133.2,-536.131 132.95,-536.131 132.95,-534.919
  region net -2.5V: 140.21,-548.544 140.21,-549.756 139.96,-549.756 139.96,-548.544
  region net GND: 139.71,-548.544 139.71,-549.756 139.46,-549.756 139.46,-548.544
  region net NetC21_2: 139.21,-548.544 139.21,-549.756 138.96,-549.756 138.96,-548.544
  region: 138.71,-548.544 138.71,-549.756 138.46,-549.756 138.46,-548.544
  region net NetC22_1: 138.21,-548.544 138.21,-549.756 137.96,-549.756 137.96,-548.544
  region: 137.71,-548.544 137.71,-549.756 137.46,-549.756 137.46,-548.544
  region net NetC23_2: 137.21,-548.544 137.21,-549.756 136.96,-549.756 136.96,-548.544
  region net -2.5V: 136.71,-548.544 136.71,-549.756 136.46,-549.756 136.46,-548.544
  region net NetC20_1: 136.21,-548.544 136.21,-549.756 135.96,-549.756 135.96,-548.544
  region net -2.5V: 135.71,-548.544 135.71,-549.756 135.46,-549.756 135.46,-548.544
  region net +2.5V: 135.21,-548.544 135.21,-549.756 134.96,-549.756 134.96,-548.544
  region net +2.5V: 134.71,-548.544 134.71,-549.756 134.46,-549.756 134.46,-548.544
  region net -2.5V: 134.21,-548.544 134.21,-549.65 133.96,-549.65 133.96,-548.544
  region net +2.5V: 133.71,-548.544 133.71,-549.756 133.46,-549.756 133.46,-548.544
  region: 133.21,-548.544 133.21,-549.65 132.96,-549.65 132.96,-548.544
  region net NetR1_1: 132.71,-548.544 132.71,-549.756 132.46,-549.756 132.46,-548.544
  region net Elec_1: 130.131,-546.225 128.919,-546.225 128.919,-545.975 130.131,-545.975
  region net Elec_2: 130.131,-545.725 128.919,-545.725 128.919,-545.475 130.131,-545.475
  region net Elec_3: 130.131,-545.225 128.919,-545.225 128.919,-544.975 130.131,-544.975
  region net Elec_4: 130.131,-544.725 128.919,-544.725 128.919,-544.475 130.131,-544.475
  region net Elec_5: 130.131,-544.225 128.919,-544.225 128.919,-543.975 130.131,-543.975
  region net Elec_6: 130.131,-543.725 128.919,-543.725 128.919,-543.475 130.131,-543.475
  region: 130.131,-543.225 128.919,-543.225 128.919,-542.975 130.131,-542.975
  region net DVDD: 143.756,-538.725 142.544,-538.725 142.544,-538.475 143.756,-538.475
  region net DRDY: 143.756,-539.225 142.544,-539.225 142.544,-538.975 143.756,-538.975
  region net NetR11_1: 143.756,-539.725 142.544,-539.725 142.544,-539.475 143.756,-539.475
  region net NetR12_1: 143.756,-540.225 142.544,-540.225 142.544,-539.975 143.756,-539.975
  region net NetR13_1: 143.756,-540.725 142.544,-540.725 142.544,-540.475 143.756,-540.475
  region net MISO: 143.756,-541.225 142.544,-541.225 142.544,-540.975 143.756,-540.975
  region net NetR14_1: 143.756,-541.725 142.544,-541.725 142.544,-541.475 143.756,-541.475
  region net GND: 143.756,-542.225 142.544,-542.225 142.544,-541.975 143.756,-541.975
  region net SCK: 143.756,-542.725 142.544,-542.725 142.544,-542.475 143.756,-542.475
  region net CS: 143.756,-543.225 142.544,-543.225 142.544,-542.975 143.756,-542.975
  region net START: 143.756,-543.725 142.544,-543.725 142.544,-543.475 143.756,-543.475
  region: 143.756,-544.225 142.544,-544.225 142.544,-543.975 143.756,-543.975
  region net RESET: 143.756,-544.725 142.544,-544.725 142.544,-544.475 143.756,-544.475
  region net PWDN: 143.756,-545.225 142.544,-545.225 142.544,-544.975 143.756,-544.975
  region net MOSI: 143.756,-545.725 142.544,-545.725 142.544,-545.475 143.756,-545.475
  region net GND: 143.756,-546.225 142.544,-546.225 142.544,-545.975 143.756,-545.975
  region net -2.5V: 106.337,-540.906 106.555,-540.688 111.961,-540.688 112.133,-540.86 112.133,-544.813 111.883,-545.063 106.537,-545.063 106.337,-544.863
  region net +2.5V: 106.337,-535.818 106.555,-535.6 111.961,-535.6 112.133,-535.772 112.133,-539.725 111.883,-539.975 106.537,-539.975 106.337,-539.775
  region net +2.5V: 132.921,-554.739 133.06,-554.6 136.332,-554.6 136.6,-554.868 136.6,-560.05 136.425,-560.225 136.413,-560.213 134.913,-560.213 134.71,-560.01 134.71,-557.16 134.425,-556.875 133.075,-556.875 132.955,-556.755
  region net -2.5V: 137.349,-552.804 137.503,-552.65 138.625,-552.65 138.85,-552.875 138.85,-553.925 139.075,-554.15 144.225,-554.15 144.373,-554.298 144.373,-558.027 144.225,-558.175 137.55,-558.175 137.35,-557.975
  region net DVDD: 141.375,-538.7 142.8,-538.7 142.8,-534.875 143.4,-534.275 144.425,-534.275 146.628,-534.275 146.9,-534.003 146.9,-530.9 146.75,-530.75 141.725,-530.75 141.35,-531.125 141.35,-534.5
Signal Layer 2:
  region net DVDD: 141.385,-532.715 141.55,-532.55 144.525,-532.55 144.7,-532.725 144.7,-534.5 144.525,-534.675 141.575,-534.675 141.385,-534.485
Bottom Layer:
  region net DVDD: 109.058,-547.367 121.9,-534.525 139.025,-534.525 141.25,-532.3 144.475,-532.3 144.85,-532.675 144.85,-536.625 144.375,-537.1 123.85,-537.1 110.704,-550.246 109.058,-548.601
  region net DVDD: 106.225,-546.275 106.55,-545.95 111.825,-545.95 112.075,-546.2 112.075,-550.1 111.825,-550.35 106.4,-550.35 106.225,-550.175

## Silkscreen, mask and mechanical layers (free items; w line width, h text height)
Top Overlay:
  text "elec4" at 114.27,-521.517 h0.8
  text "elec6" at 129.57,-521.517 h0.8
  text "elec2" at 144.416,-521.517 h0.8
  text "3N_w" at 129.55,-525.07 h0.8 r90
  text "+2.5" at 134.775,-525.739 h0.8 r90
  text "-2.5" at 125.875,-525.775 h0.8 r90
  text "1N" at 148.075,-525.95 h0.8 r90
  text "2N" at 117.875,-526.034 h0.8 r90
  text "GND" at 115.225,-526.834 h0.8 r90
  text "GND" at 145.475,-526.834 h0.8 r90
  text "-2.5" at 112.725,-527.5 h0.8 r90
  text "+2.5" at 120.4,-527.5 h0.8 r90
  text "-2.5" at 142.975,-527.5 h0.8 r90
  text "+2.5" at 150.65,-527.5 h0.8 r90
  text "REF_IN" at 122.525,-529.375 h0.8 r90
  text "BIAS" at 123.75,-529.4 h0.8 r90
  text "DRDY" at 154.675,-530.8 h0.7
  text "MISO" at 154.675,-533.325 h0.7
  text "SCK" at 154.675,-535.875 h0.7
  text "ADC" at 128.795,-537.358 h1
  text "CS" at 154.675,-538.475 h0.7
  text "+2.5V" at 105.811,-539.294 h1.5 r90
  text "START" at 154.225,-540.975 h0.7
  text "RESET" at 154.225,-543.7 h0.7
  text "-2.5V" at 105.811,-544.325 h1.5 r90
  text "PWDN" at 154.675,-546.1 h0.7
  text "MOSI" at 154.675,-548.6 h0.7
  text "DVDD" at 105.806,-549.9 h1.5 r90
  text "GND" at 105.822,-554.35 h1.5 r90
  text "+2.5" at 142.65,-562.175 h0.8 r90
  text "GND" at 147.9,-562.175 h0.8 r90
  text "-2.5" at 150.366,-562.175 h0.8 r90
  text "+2.5" at 112.725,-562.2 h0.8 r90
  text "2P" at 115.1,-562.2 h0.8 r90
  text "GND" at 117.975,-562.2 h0.8 r90
  text "-2.5" at 120.441,-562.2 h0.8 r90
  text "1P" at 144.9,-562.2 h0.8 r90
  text "3P_w" at 129.55,-564.975 h0.8 r90
  text "+2.5" at 134.74,-565.825 h0.8 r90
  text "-2.5" at 125.7,-565.884 h0.8 r90
  text "elec3" at 114.225,-566.275 h0.8
  text "elec5" at 129.525,-566.275 h0.8
  text "elec1" at 144.371,-566.275 h0.8
Bottom Overlay:
  text "BIAS" at 120.725,-559.725 h1
Top Solder:
  drawing of 56 lines, arcs and shapes, not listed